# Altium PCB ROS_CAR.PcbDoc (part 4 of 13)
Units mil, origin at the board's own origin, x right, y up, seen from the top; angles counter-clockwise.
Board outline 3937.01 x 3937.01 mil, 2 copper layers (Top Layer, Bottom Layer); 201 components, 155 nets, 998 pads, 0 vias.
Unrouted connection lines stored in the file: 3.
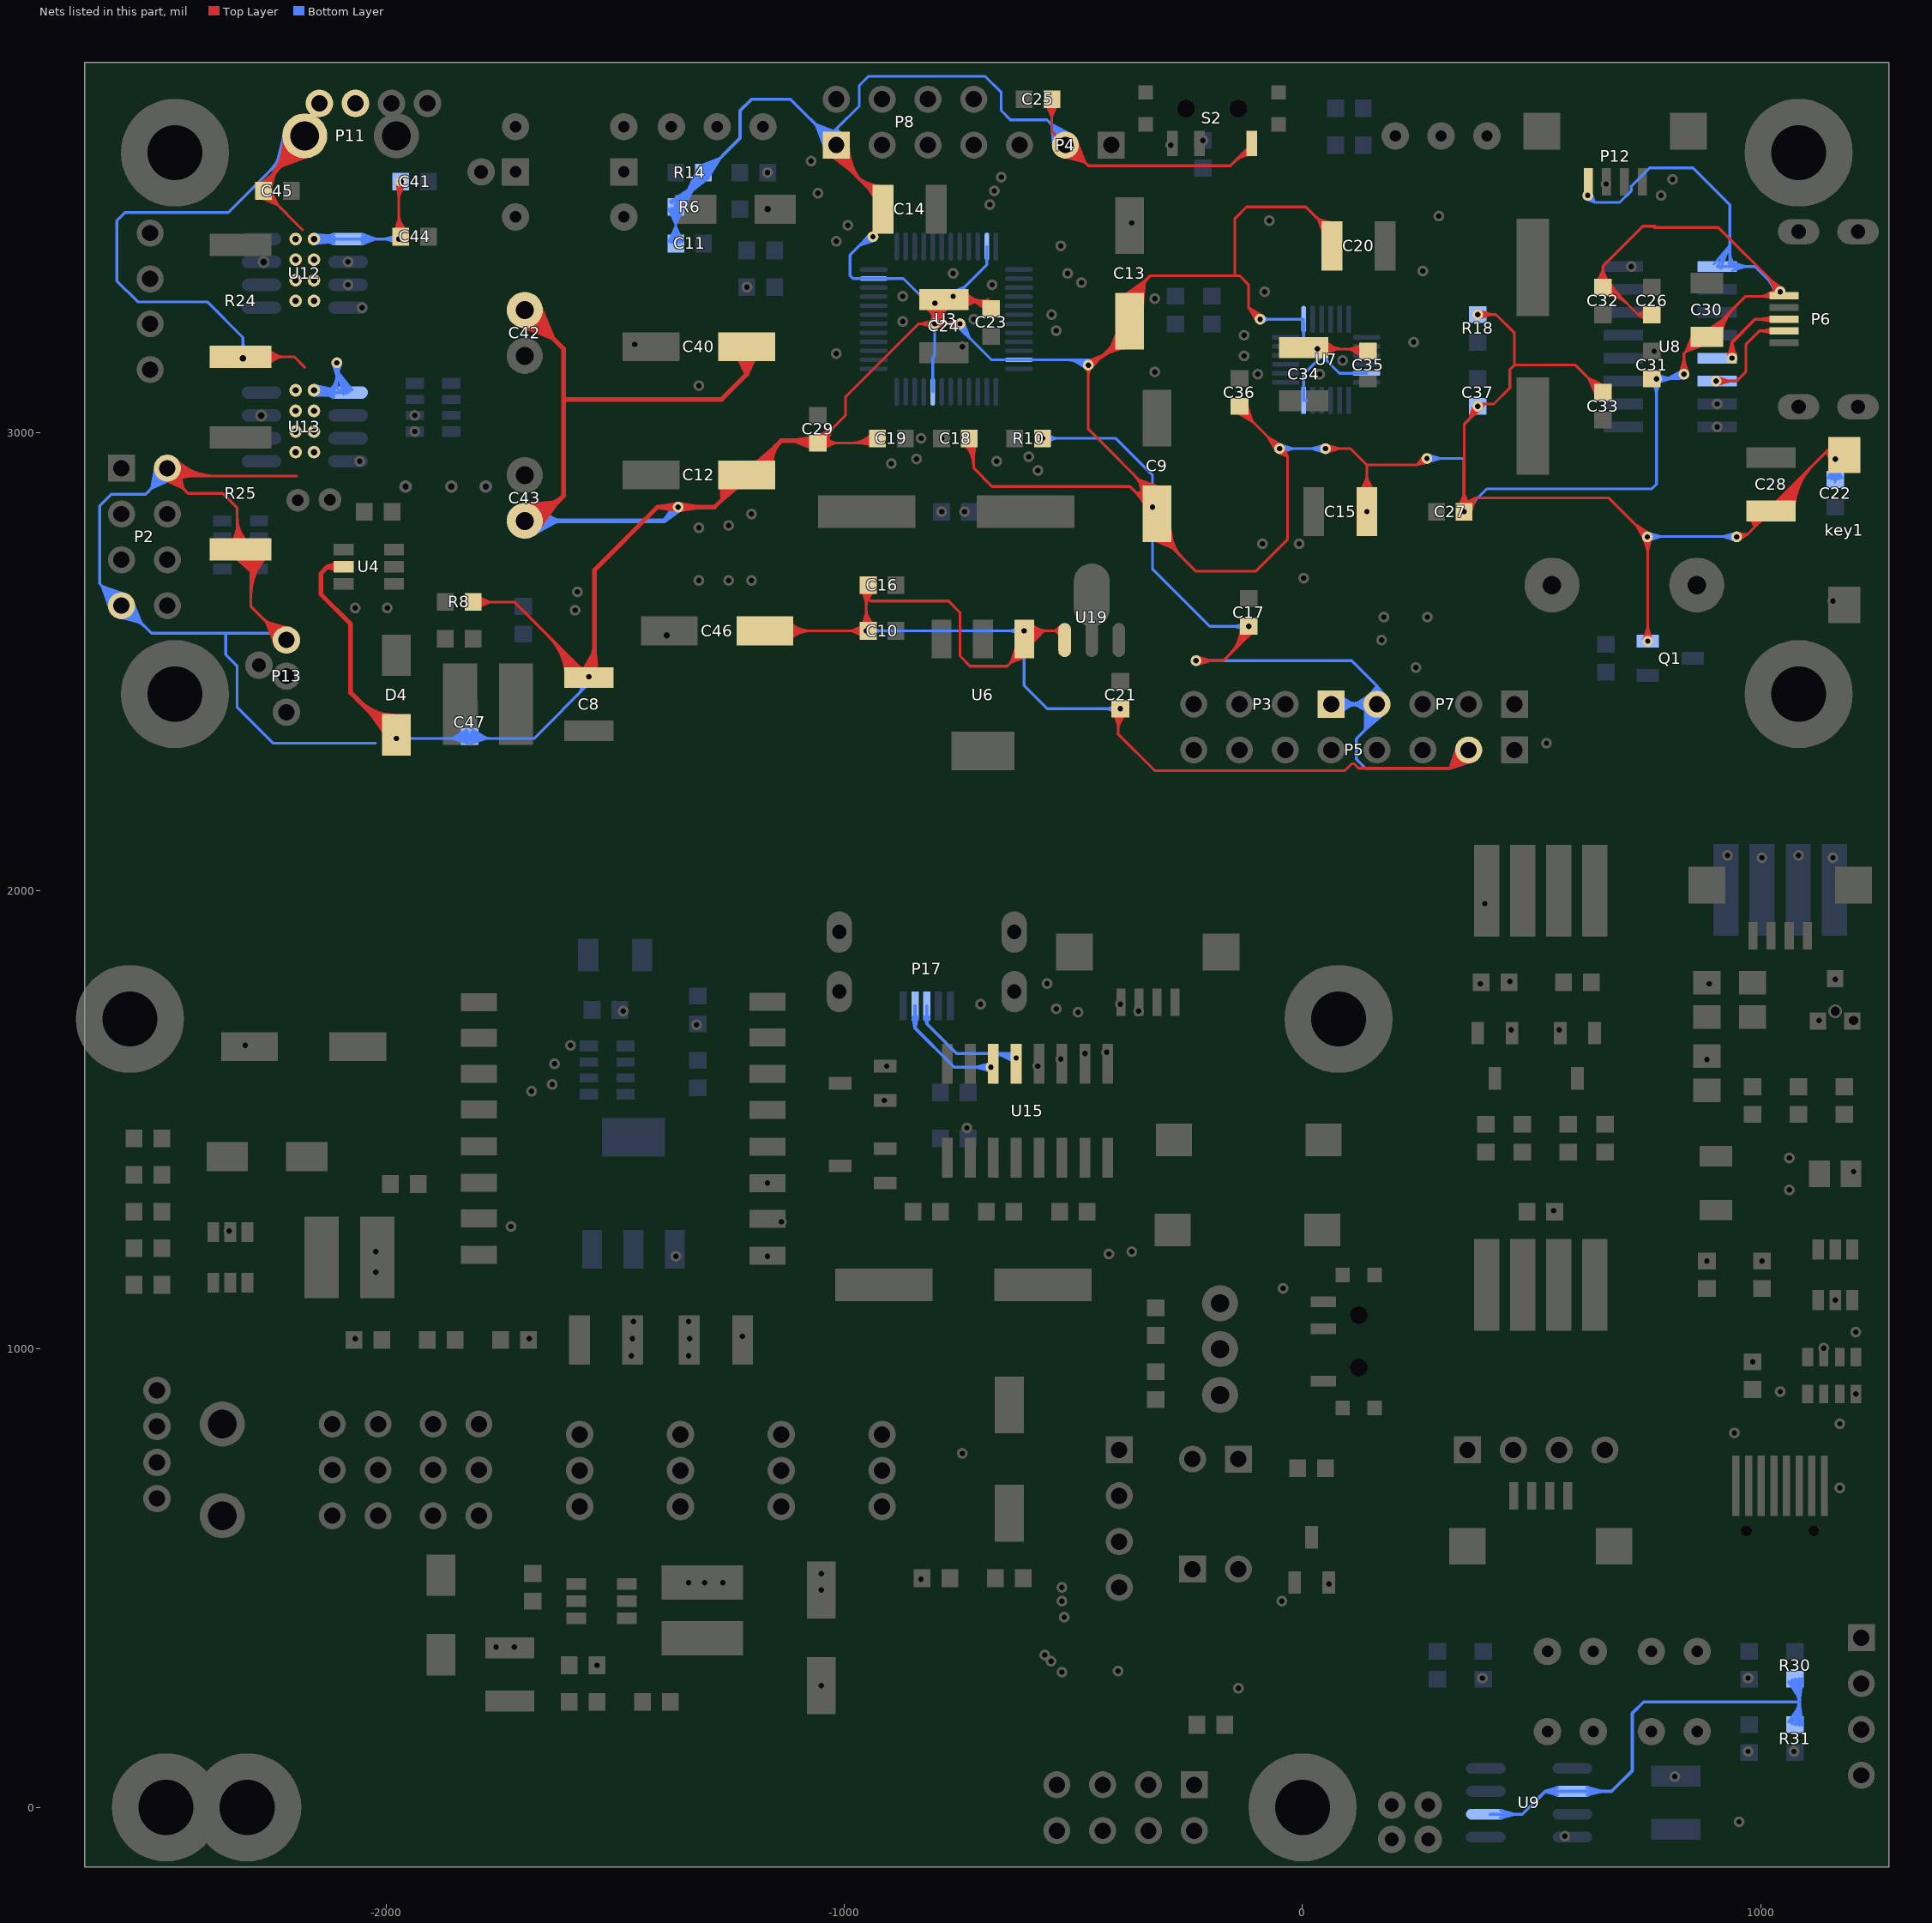
[diagram p4: the nets of this part, all layers, seen from the top]

## Nets (pads, with @x,y where several pads share a name; then routed paths per layer and width w, separated by ;. In a path a pad name is that pad's centre, name@x,y a point inside that pad or via, vN(x,y) a via of type N, cw(c..) or ccw(c..) an arc to the next point about the centre after c; other vN are vias at no path point) (continued)
CGND: (continued)
  Top Layer w6: -2247.48,3506.77 -2254.62,3533.89 -2247.48,3506.77 ; -2247.48,3506.77 -2247.17,3506.77 ; -2247.17,3506.77 -2272.95,3518.36 -2247.17,3506.77 ; -2247.17,3506.77 -2260.4,3531.75 -2247.17,3506.77 ; -2247.17,3506.77 -2274.85,3512.52 -2247.17,3506.77 ; -2247.17,3506.77 -2254.7,3534.02 -2247.17,3506.77 ; -1974.6,3457.6 pad.1@-1972.48,3422.09 ; -1973.92,3453.31 pad.1@-1972.48,3422.09 ; pad.1@-1972.48,3422.09 -1970.46,3455.52 ; pad.1@-1972.48,3422.09 -1971.03,3453.34 ; pad.1@-1972.48,3422.09 -1972,3452.04 ; -1591.96,2501.57 C8.2@-1569.75,2472.47 ; -1583.82,2490.9 pad.1@-1557.48,2467.09 ; C8.2@-1569.75,2472.47 pad.1@-1557.48,2467.09 ; -1026.45,3007.81 -1056.5,2976.77 -1020.19,2976.77 ; -984.1,2567.09 pad.1@-952.48,2567.09 ; -984.1,2567.09 C10.1@-953.71,2575.81 ; -984.1,2567.09 C10.1@-953.71,2558.36 ; -984.1,2567.09 pad.1@-952.48,2567.09 ; -984.1,2567.09 C10.1@-953.71,2575.81 ; -984.1,2567.09 C10.1@-953.71,2558.36 ; -984.1,2567.09 C10.1@-951.02,2582.05 ; -984.1,2567.09 C10.1@-951.02,2552.12 ; -983.68,2566.98 pad.1@-952.48,2567.09 ; -983.68,2567.2 pad.1@-952.48,2567.09 ; -983.68,2567.2 C10.1@-953.76,2558.37 ; -982.48,2566.94 pad.1@-952.48,2567.09 ; -982.48,2566.94 C10.1@-953.73,2558.36 ; -982.48,2567.24 pad.1@-952.48,2567.09 ; -982.48,2567.24 C10.1@-953.73,2575.81 ; -982.29,2567.09 pad.1@-952.48,2567.09 ; -982.29,2567.09 -953.78,2575.8 -982.29,2567.09 ; -982.29,2567.09 C10.1@-953.78,2558.37 ; -982.29,2567.09 pad.1@-952.48,2567.09 ; -982.29,2567.09 C10.1@-953.78,2558.37 ; -953.79,2600.23 pad.1@-952.48,2567.09 ; -953.37,2597.61 pad.1@-952.48,2567.09 ; -953.37,2597.61 -961.23,2568.1 -952.48,2604.62 ; pad.1@-952.48,2567.09 -952.48,2604.62 ; pad.1@-952.48,2567.09 C10.1@-938.79,2570.41 ; pad.1@-952.48,2567.09 -951.22,2598.88 ; pad.1@-952.48,2567.09 -951.58,2597.63 ; pad.1@-952.48,2567.09 -952.19,2596.96 ; pad.1@-952.48,2567.09 -952.48,2596.9 ; pad.1@-952.48,2567.09 C10.1@-951.02,2582.05 ; pad.1@-952.48,2567.09 C10.1@-951.02,2552.12 ; -952.48,2604.62 C10.1@-938.79,2570.41 ; -952.48,2629.29 -947.8,2666.1 -947.8,2637.4 ; C24.2@-811.23,3281.03 pad.1@-802.48,3245.44 ; C24.2@-811.23,3281.03 pad.1@-802.48,3245.44 ; C24.2@-811.23,3281.03 pad.1@-802.48,3245.44 ; pad.1@-802.48,3237.09 -796.72,3267.06 ; pad.1@-802.48,3237.09 -792.83,3267.02 ; pad.1@-802.48,3237.09 -788.6,3266.6 ; pad.1@-802.48,3237.09 -785.07,3265.94 ; pad.1@-802.48,3237.09 -781.23,3264.94 ; pad.1@-802.48,3237.09 -802.2,3266.9 ; pad.1@-802.48,3237.09 -799.51,3266.96 ; pad.1@-802.48,3237.09 pad.1@-802.48,3282.09 ; pad.1@-802.48,3245.44 pad.1@-802.48,3282.09 ; pad.1@-802.48,3245.44 C24.2@-793.73,3281.03 ; pad.1@-802.48,3245.44 pad.1@-802.48,3282.09 ; pad.1@-802.48,3245.44 C24.2@-793.73,3281.03 ; pad.1@-802.48,3245.44 pad.1@-802.48,3282.09 ; pad.1@-802.48,3245.44 C24.2@-793.73,3281.03 ; pad.1@-802.48,3245.44 C24.2@-789.87,3292.77 ; pad.1@-802.48,3245.44 C24.2@-795.78,3293.97 ; pad.1@-802.48,3245.44 C24.2@-801.85,3294.42 ; pad.1@-802.48,3282.09 C24.2@-789.87,3292.77 ; pad.1@-802.48,3282.09 C24.2@-795.78,3293.97 ; pad.1@-802.48,3282.09 C24.2@-801.85,3294.42 ; pad.1@-802.48,3282.09 C24.2@-772.48,3282.09 ; C24.2@-772.48,3282.09 pad.1@-762.48,3297.09 ; pad.1@-762.48,3297.09 C24.2@-750.44,3297.88 ; pad.1@-762.48,3297.09 C24.2@-732.17,3292.89 ; pad.1@-762.48,3297.09 C24.2@-729.07,3288.45 ; C24.2@-750.44,3297.88 -710.89,3287.09 ; pad.1@-607.48,2567.09 -577.67,2567.19 ; pad.1@-607.48,2567.09 -576.84,2565.51 ; pad.1@-607.48,2567.09 -574.46,2564.41 ; pad.1@-607.48,2567.09 -539.06,2567.09 ; P4.2@-517.48,3627.09 -474.18,3588.79 ; pad.1@-467.48,3147.09 -437.22,3167.35 ; pad.1@-467.48,3147.09 -467.48,3007.48 -327.48,2867.48 pad.1@-327.48,2837.09 ; -403.13,2364.66 pad.1@-397.48,2397.09 ; -403.13,2364.66 C21.2@-389.08,2394.43 ; -402.48,2360.17 pad.1@-397.48,2397.09 ; -402.48,2360.17 -406.29,2397.23 -402.35,2366.98 ; -402.48,2360.17 C21.2@-383.93,2391.98 ; -402.48,2366.64 pad.1@-397.48,2397.09 ; -402.48,2366.64 C21.2@-389.08,2394.43 ; -402.35,2366.98 pad.1@-397.48,2397.09 ; -402.35,2366.98 C21.2@-389.08,2394.44 ; -401.68,2367.44 pad.1@-397.48,2397.09 ; -401.06,2367.2 pad.1@-397.48,2397.09 ; -400.57,2365.21 pad.1@-397.48,2397.09 ; pad.1@-397.48,2397.09 C21.2@-383.93,2391.98 ; -361.7,2866.98 C9.2@-319.02,2849.04 ; -355.97,2864.57 pad.1@-327.48,2837.09 ; -355.67,2858.95 pad.1@-327.48,2837.09 ; -353.79,2859.06 pad.1@-327.48,2837.09 ; -353.6,2858.77 pad.1@-327.48,2837.09 ; -352.79,2861.78 pad.1@-327.48,2837.09 ; -352.52,2859.87 pad.1@-327.48,2837.09 ; C9.2@-345.48,2866.28 pad.1@-327.48,2837.09 ; C9.2@-341.19,2865.03 pad.1@-327.48,2837.09 ; C9.2@-339.26,2868.76 pad.1@-327.48,2837.09 ; pad.1@-327.48,2837.09 C9.2@-319.02,2849.04 ; -135.24,2547.48 C17.2@-117.48,2576.77 ; -133.02,2549.01 C17.2@-117.48,2576.77 ; -131.92,2549.02 C17.2@-117.48,2576.77 ; C17.2@-131.58,2570.82 C17.2@-117.48,2576.77 ; C17.2@-131.58,2570.82 -123.1,2583.56 C17.2@-131.58,2570.82 ; C17.2@-131.58,2570.82 -116.54,2568.01 C17.2@-131.58,2570.82 ; C17.2@-131.58,2570.82 C17.2@-117.48,2576.77 ; C17.2@-131.58,2570.82 -117.48,2557.09 ; C17.2@-131.58,2570.82 -117.48,2557.09 ; -131.55,2542.87 C17.2@-117.48,2576.77 ; -131.55,2542.87 -125.96,2579.15 -130.6,2546.07 ; -131.09,2548.42 C17.2@-117.48,2576.77 ; -130.6,2546.07 C17.2@-117.48,2576.77 ; C17.2@-126.07,2574.8 -117.48,2557.09 ; C17.2@-126.07,2574.8 -117.48,2557.09 ; C17.2@-126.07,2574.8 -117.48,2557.09 ; C17.2@-126.07,2574.8 -117.48,2557.09 ; C17.2@-126.07,2574.8 -117.48,2557.09 ; C17.2@-126.07,2574.8 -117.48,2557.09 ; C17.2@-126.07,2574.8 -117.48,2557.09 ; C17.2@-126.07,2574.8 -117.48,2557.09 ; C17.2@-126.07,2574.8 -117.48,2557.09 ; C17.2@-126.07,2574.8 -117.48,2557.09 ; C17.2@-126.07,2574.8 -117.48,2557.09 ; C17.2@-126.07,2574.8 -117.48,2557.09 ; C17.2@-126.07,2574.8 -117.48,2557.09 ; C17.2@-126.07,2574.8 -117.48,2557.09 ; -117.48,2557.09 C17.2@-117.48,2576.77 ; -117.48,2557.09 C17.2@-108.89,2574.8 ; -117.48,2557.09 C17.2@-108.89,2574.8 ; -117.48,2557.09 C17.2@-117.48,2576.77 ; -117.48,2557.09 C17.2@-108.89,2574.8 ; -117.48,2557.09 C17.2@-117.48,2576.77 ; -117.48,2557.09 C17.2@-108.89,2574.8 ; -117.48,2557.09 C17.2@-117.48,2576.77 ; -117.48,2557.09 C17.2@-108.89,2574.8 ; -117.48,2557.09 C17.2@-117.48,2576.77 ; -117.48,2557.09 C17.2@-108.89,2574.8 ; -117.48,2557.09 C17.2@-117.48,2576.77 ; -117.48,2557.09 C17.2@-108.89,2574.8 ; -117.48,2557.09 C17.2@-117.48,2576.77 ; -117.48,2557.09 C17.2@-108.89,2574.8 ; -117.48,2557.09 C17.2@-117.48,2576.77 ; -117.48,2557.09 C17.2@-108.89,2574.8 ; -117.48,2557.09 C17.2@-117.48,2576.77 ; -117.48,2557.09 C17.2@-108.89,2574.8 ; -117.48,2557.09 C17.2@-108.89,2574.8 ; -117.48,2557.09 C17.2@-117.48,2576.77 ; -117.48,2557.09 C17.2@-108.89,2574.8 ; -117.48,2557.09 C17.2@-117.48,2576.77 ; -117.48,2557.09 C17.2@-108.89,2574.8 ; -117.48,2557.09 C17.2@-117.48,2576.77 ; -117.48,2557.09 C17.2@-108.89,2574.8 ; -117.48,2557.09 -120.78,2576.49 -117.48,2557.09 ; -117.48,2557.09 -114.18,2576.49 -117.48,2557.09 ; -117.48,2557.09 -126.52,2574.57 -117.48,2557.09 ; -117.48,2557.09 -108.44,2574.57 -117.48,2557.09 ; -117.48,2557.09 C17.2@-103.38,2570.82 ; -117.48,2557.09 C17.2@-117.48,2576.77 ; -117.48,2557.09 C17.2@-103.38,2570.82 ; -117.48,2557.09 C17.2@-117.48,2576.77 ; C17.2@-117.48,2576.77 C17.2@-103.38,2570.82 ; C17.2@-117.48,2576.77 C17.2@-103.38,2570.82 ; C17.2@-103.38,2570.82 -118.42,2568.01 C17.2@-103.38,2570.82 ; C17.2@-103.38,2570.82 -111.86,2583.56 C17.2@-103.38,2570.82 ; pad.1@32.52,3182.09 66.16,3184.33 ; pad.1@32.52,3182.09 65.72,3179.89 ; pad.1@32.52,3182.09 62.74,3183.04 ; pad.1@32.52,3182.09 63.01,3180.88 ; 140.59,2929.02 249.45,2929.02 ; 351.53,2859.43 pad.1@352.52,2827.09 ; 352.18,2857.21 pad.1@352.52,2827.09 ; pad.1@352.52,2827.09 354.06,2859.72 ; pad.1@352.52,2827.09 353.48,2857.34 ; pad.1@352.52,2827.09 352.83,2856.9 ; pad.1@352.52,2827.09 352.83,2856.9 ; pad.1@352.52,2827.09 375.72,2853.46 ; pad.1@352.52,2827.09 374.34,2852.61 ; pad.1@352.52,2827.09 374.45,2854.89 ; pad.1@352.52,2827.09 373.69,2853.3 ; pad.1@352.52,2827.09 373.64,2853.2 ; pad.1@352.52,2827.09 373.84,2852.77 ; 352.83,2856.9 361.25,2828.3 352.83,2856.9 ; 352.83,2856.9 343.82,2828.48 352.83,2856.9 ; 352.83,2864.38 352.83,2828.07 377.52,2857.09 ; 363.89,3028.45 pad.1@382.52,3057.09 ; 373.64,2853.2 360.04,2822.49 373.69,2853.3 ; 373.64,2853.2 346.45,2833.48 373.69,2853.3 ; pad.1@382.52,3057.09 397.52,3062.09 ; 397.52,3062.09 417.52,3062.09 452.52,3097.09 452.52,3137.09 462.52,3147.09 ; 728.86,2797.32 pad.1@752.52,2772.09 753.31,2742.25 ; 1005.9,3297.09 pad.1@1042.52,3307.09 ; 1020.41,3334.2 pad.1@1042.52,3307.09 ; 1142.52,2957.09 pad.1@1162.52,2942.09 ; 1142.52,2957.09 key1.2@1166.48,2949.96 ; 1142.52,2957.09 key1.2@1156.07,2936.08 ; 1142.52,2957.09 pad.1@1162.52,2942.09 ; 1142.52,2957.09 key1.2@1166.48,2949.96 ; 1142.52,2957.09 key1.2@1156.07,2936.08 ; 1142.52,2957.09 pad.1@1162.52,2942.09 ; 1142.52,2957.09 key1.2@1166.48,2949.96 ; 1142.52,2957.09 key1.2@1156.07,2936.08 ; 1142.52,2957.09 pad.1@1162.52,2942.09 ; 1142.52,2957.09 key1.2@1166.48,2949.96 ; 1142.52,2957.09 key1.2@1156.07,2936.08 ; 1142.52,2957.09 pad.1@1162.52,2942.09 ; 1142.52,2957.09 key1.2@1166.48,2949.96 ; 1142.52,2957.09 key1.2@1156.07,2936.08 ; 1142.52,2957.09 key1.2@1181.07,2946.1 ; 1142.52,2957.09 key1.2@1178.98,2940.42 ; 1142.52,2957.09 key1.2@1176,2935.04 ; 1142.52,2957.09 key1.2@1172.16,2930.09 ; 1142.52,2957.09 key1.2@1167.45,2925.69 ; pad.1@1162.52,2942.09 key1.2@1181.07,2946.1 ; pad.1@1162.52,2942.09 key1.2@1178.98,2940.42 ; pad.1@1162.52,2942.09 key1.2@1176,2935.04 ; pad.1@1162.52,2942.09 key1.2@1167.45,2925.69 ; pad.1@1162.52,2942.09 key1.2@1172.16,2930.09
  Top Layer w10: U4.2@-2106.97,2701.57 ccw(c-2120.28,2688.27) -2120.28,2707.09 ccw(c-2120.28,2725.91) U4.2@-2106.97,2712.6 ; U4.2@-2102.62,2699.38 -2127.48,2707.09 ; U4.2@-2102.62,2714.79 -2127.48,2707.09 ; U4.2@-2101.46,2707.09 -2127.48,2707.09 ; U4.2@-2092.6,2707.09 -2127.48,2707.09 ; -2060.55,2415.16 ccw(c-1977.48,2498.23) D4.1@-1977.48,2380.75 ; -2043.48,2398.09 ccw(c-1977.48,2464.08) D4.1@-1977.48,2370.75 ; -2026.41,2381.01 ccw(c-1977.48,2429.94) D4.1@-1977.48,2360.75 ; -2009.34,2363.94 ccw(c-1977.48,2395.8) D4.1@-1977.48,2350.75 ; D4.1@-1995.49,2334.81 -2033.18,2387.79 ; D4.1@-1987.71,2341.31 -2033.18,2387.79 ; D4.1@-1984.29,2332.09 ccw(c-2000.73,2332.09) -1989.11,2343.71 ccw(c-1977.48,2355.34) D4.1@-1977.48,2338.9 ; D4.1@-1982.63,2327.63 -2010.5,2365.11 D4.1@-1973.03,2337.24 ; D4.1@-1982.6,2327.6 -2010.81,2364.92 ; D4.1@-1981.1,2348.86 -2033.18,2387.79 ; D4.1@-1977.48,2354.25 -2033.18,2387.79 ; D4.1@-1974.41,2359.98 -2033.18,2387.79 ; D4.1@-1973.07,2337.27 -2010.81,2364.92 ; D4.1@-1970.83,2369.35 -2033.18,2387.79 ; D4.1@-1968.73,2379.26 -2033.18,2387.79 ; C42.2@-1716.41,3238.4 -1636.9,3206.5 ; C42.2@-1712.09,3247.58 -1636.9,3206.5 ; C43.2@-1707.89,2839.84 -1627.07,2847.49 ; C42.2@-1706.75,3256.11 -1636.9,3206.5 ; C43.2@-1706.3,2829.8 -1627.07,2847.49 ; C43.2@-1703.5,2820.13 -1627.07,2847.49 ; C42.2@-1697.48,3232.72 cw(c-1697.48,3149.74) -1638.81,3208.41 cw(c-1580.13,3267.09) C42.2@-1663.11,3267.09 ; C42.2@-1697.48,3242.72 cw(c-1697.48,3183.88) -1655.88,3225.48 cw(c-1614.28,3267.09) C42.2@-1673.11,3267.09 ; C42.2@-1697.48,3267.09 -1612.48,3182.09 -1612.48,2862.09 ; C43.2@-1696.45,2811.33 ccw(c-1684.91,2858.95) -1650.26,2824.3 ; C43.2@-1694.09,2821.05 ccw(c-1679.99,2879.22) -1637.67,2836.9 ; C43.2@-1691.74,2830.77 ccw(c-1675.08,2899.49) -1625.08,2849.49 ; C43.2@-1689.38,2840.49 ccw(c-1670.16,2919.76) -1612.48,2862.08 ; C43.2@-1689.25,2795.31 -1627.07,2847.49 ; C42.2@-1686.5,3276.36 -1636.9,3206.5 ; C43.2@-1682.31,2788.01 -1627.07,2847.49 ; C42.2@-1677.97,3281.69 -1636.9,3206.5 ; C43.2@-1674.45,2781.57 -1627.07,2847.49 ; C42.2@-1668.8,3286.02 -1636.9,3206.5 ; -1612.48,3072.09 -1267.48,3072.09 -1213.15,3126.42 ; C8.2@-1570.09,2477.77 ccw(c-1630.67,2538.34) -1545,2538.34 ; C8.2@-1564.99,2467.4 -1545,2520.6 ; C8.2@-1564.04,2468.92 -1549.02,2509.91 ; C8.2@-1564.01,2469.04 -1545.07,2520.48 ; C8.2@-1563.96,2469.18 -1547.82,2508.1 ; C8.2@-1563.92,2469.3 -1545,2513.82 ; C8.2@-1563.89,2469.38 -1545.92,2509.55 ; C8.2@-1563.02,2470.7 ccw(c-1606.53,2514.2) -1545,2514.2 ; C8.2@-1562.3,2471.9 ccw(c-1604.05,2513.66) -1545,2513.66 ; C8.2@-1560.59,2461.03 C8.2@-1574.05,2471.76 ; C8.2@-1557.48,2465.16 -1545,2520.6 ; C8.2@-1556.97,2473.88 C8.2@-1574.05,2471.76 ; C8.2@-1556.75,2460.31 C8.2@-1545,2465 ; C8.2@-1555.95,2463.63 ccw(c-1582.38,2490.06) -1545,2490.06 ; C8.2@-1555.23,2464.83 ccw(c-1579.91,2489.52) -1545,2489.52 ; C8.2@-1554.59,2473.25 C8.2@-1545,2465 ; C8.2@-1550.79,2465.8 -1545,2513.82 ; C8.2@-1550.79,2465.81 -1545.92,2509.55 ; C8.2@-1550.76,2465.96 -1545.07,2520.48 ; C8.2@-1550.75,2466.07 -1547.82,2508.1 ; C8.2@-1550.72,2466.29 -1549.02,2509.91 ; C8.2@-1549.74,2463.97 -1545,2520.6 ; C8.2@-1548.15,2457.76 ccw(c-1555.77,2465.38) C8.2@-1545,2465.38 ; C8.2@-1539.68,2464.02 -1545,2520.6 ; pad.1@-1367.3,2832.27 ccw(c-1378.92,2820.64) -1378.92,2837.09 ccw(c-1378.92,2853.53) pad.1@-1367.3,2841.9 ; pad.1@-1363.04,2830.3 -1404.29,2837.09 pad.1@-1363.04,2843.88 ; pad.1@-1361.93,2830.3 -1320.67,2837.09 pad.1@-1361.93,2843.88 ; pad.1@-1357.66,2832.27 cw(c-1346.04,2820.64) -1346.04,2837.09 cw(c-1346.04,2853.53) pad.1@-1357.66,2841.9 ; C12.2@-1269.8,2911.43 -1265.86,2854.38 ; -1267.89,2852.34 ccw(c-1289.09,2873.54) C12.2@-1264.98,2891.35 ; -1259.68,2860.56 ccw(c-1279.64,2880.52) C12.2@-1256.93,2897.29 ; C12.2@-1259.63,2911.23 -1265.86,2854.38 ; -1251.46,2868.77 ccw(c-1270.19,2887.5) C12.2@-1248.89,2903.23 ; C12.2@-1249.78,2909.26 -1265.86,2854.38 ; C12.2@-1243.66,2907.09 -1265.86,2854.38 ; C40.2@-1239.01,3181.3 -1213.15,3126.42 ; C12.2@-1237.83,2904.23 -1265.86,2854.38 ; C40.2@-1231.16,3167.65 cw(c-1269.35,3126.42) -1213.15,3126.42 ; C12.2@-1229.54,2898.56 -1265.86,2854.38 ; C40.2@-1229.49,3184.84 -1213.15,3126.42 ; C40.2@-1224.36,3174.99 cw(c-1248.14,3149.32) -1213.15,3149.32 cw(c-1178.16,3149.32) C40.2@-1201.94,3174.99 ; C12.2@-1222.29,2891.43 -1265.86,2854.38 ; C40.2@-1219.64,3186.74 -1213.15,3126.42 ; C12.2@-1212.05,2908.19 C12.2@-1188.58,2908.19 ; C40.2@-1206.66,3186.74 -1213.15,3126.42 ; C12.2@-1204.01,2922.75 -1160.44,2959.8 ; C40.2@-1196.81,3184.84 -1213.15,3126.42 ; C12.2@-1196.76,2915.61 -1160.44,2959.8 ; C40.2@-1195.14,3167.65 ccw(c-1156.95,3126.42) -1213.15,3126.42 ; C12.2@-1188.47,2909.94 -1160.44,2959.8 ; C40.2@-1187.29,3181.3 -1213.15,3126.42 ; C12.2@-1186.03,2906.22 cw(c-1146.83,2916.2) -1175.44,2944.8 ; C12.2@-1182.64,2907.09 -1160.44,2959.8 ; C12.2@-1176.52,2904.91 -1160.44,2959.8 ; C12.2@-1176.34,2908.69 cw(c-1127.02,2921.24) -1163.01,2957.23 ; C12.2@-1166.67,2902.94 -1160.44,2959.8 ; C12.2@-1166.65,2911.15 cw(c-1107.2,2926.28) -1150.58,2969.66 ; C12.2@-1156.96,2913.62 cw(c-1087.39,2931.32) -1138.15,2982.08 ; C12.2@-1156.5,2902.74 -1160.44,2959.8 ; -1103.42,2982.09 cw(c-1103.42,2931.81) C29.2@-1067.87,2967.36 ; -1079.28,2982.09 cw(c-1079.28,2955.96) C29.2@-1060.8,2974.43 ; -1077.76,2982.09 ccw(c-1077.76,2996.07) C29.2@-1067.87,2986.18 ; C29.2@-1061.7,2963.86 -1107.11,2982.09 ; C29.2@-1058.83,2990.07 -1107.11,2982.09 ; C29.2@-1058.46,2976.77 -1107.11,2982.09 ; C29.2@-1052.48,2982.09 -1138.15,2982.09 ; -2127.48,2707.09 -2142.48,2692.09 -2142.48,2647.09 -2077.48,2582.09 -2077.48,2432.09 pad.1@-1977.48,2332.09 -2010.81,2364.92 ; -1627.07,2847.49 C43.2@-1697.48,2807.09 -1667.48,2807.09 -1612.48,2862.09 ; C8.2@-1574.05,2471.76 pad.1@-1557.48,2467.09 ; C8.2@-1574.05,2471.76 -1545,2520.6 ; pad.1@-1557.48,2467.09 -1545.07,2520.48 ; pad.1@-1557.48,2467.09 -1549.02,2509.91 ; pad.1@-1557.48,2467.09 C8.2@-1545,2465 ; pad.1@-1557.48,2467.09 -1545,2513.82 ; pad.1@-1557.48,2467.09 -1547.82,2508.1 ; pad.1@-1557.48,2467.09 -1545.92,2509.55 ; C8.2@-1545,2465 -1545,2700 -1407.91,2837.09 -1283.15,2837.09 -1138.15,2982.09 ; -1213.15,3126.42 C40.2@-1213.15,3187.09 -1213.15,3126.42
  Bottom Layer w6: -2623.04,2668.04 cw(c-2669,2622.09) P2.7@-2604.01,2622.09 ; -2622.09,2667.09 ccw(c-2577.48,2711.71) P2.7@-2577.48,2648.61 ; -2612.8,2657.8 cw(c-2648.52,2622.09) P2.7@-2598.01,2622.09 ; -2611.85,2656.85 ccw(c-2577.48,2691.22) P2.7@-2577.48,2642.61 ; -2602.56,2647.56 cw(c-2628.03,2622.09) P2.7@-2592.01,2622.09 ; -2601.61,2646.61 ccw(c-2577.48,2670.74) P2.7@-2577.48,2636.61 ; P2.7@-2600.01,2608.08 -2619.42,2664.42 ; P2.7@-2594.33,2610.37 -2619.42,2664.42 ; P2.7@-2589.97,2598.68 -2533.68,2583.68 ; P2.7@-2588.97,2613.2 -2619.42,2664.42 ; P2.7@-2588.08,2604.51 -2533.68,2583.68 ; P2.7@-2585.62,2610.05 -2533.68,2583.68 ; P2.7@-2583.95,2616.53 -2619.42,2664.42 ; P2.7@-2582.62,2615.28 -2533.68,2583.68 ; P2.7@-2577.48,2595.56 cw(c-2577.48,2518.5) -2522.99,2572.99 ; P2.7@-2577.48,2601.56 cw(c-2577.48,2538.98) -2533.23,2583.23 ; P2.7@-2577.48,2607.56 cw(c-2577.48,2559.47) -2543.47,2593.47 ; P2.7@-2577.48,2613.56 cw(c-2577.48,2579.95) -2553.72,2603.72 ; P2.7@-2571.87,2628.51 -2619.42,2664.42 ; P2.7@-2571.4,2628.07 -2533.68,2583.68 ; P2.7@-2568.48,2633.49 -2619.42,2664.42 ; P2.7@-2566.62,2631.73 -2533.68,2583.68 ; P2.7@-2565.6,2638.83 -2619.42,2664.42 ; P2.7@-2563.26,2644.48 -2619.42,2664.42 ; P2.7@-2561.44,2634.9 -2533.68,2583.68 ; P2.7@-2556.95,2622.09 ccw(c-2520.42,2622.09) -2546.25,2596.25 ; P2.7@-2555.91,2637.53 -2533.68,2583.68 ; P2.7@-2550.95,2622.09 ccw(c-2499.93,2622.09) -2536.01,2586.01 ; -2519.56,2870 ccw(c-2559.34,2909.78) P2.2@-2503.71,2918.14 ; -2511.16,2878.41 ccw(c-2544.72,2911.98) P2.2@-2497.78,2919.04 ; -2505.69,2883.87 cw(c-2477.48,2855.66) P2.2@-2477.48,2895.56 ; -2502.75,2886.82 ccw(c-2530.11,2914.18) P2.2@-2491.85,2919.93 ; P2.2@-2501.65,2933.01 -2512.28,2877.29 ; P2.2@-2495.7,2931.54 -2512.28,2877.29 ; -2495.45,2894.12 cw(c-2477.48,2876.14) P2.2@-2477.48,2901.56 ; -2494.34,2895.23 ccw(c-2515.49,2916.37) P2.2@-2485.91,2920.82 ; P2.2@-2490,2929.46 -2512.28,2877.29 ; P2.2@-2484.59,2926.8 -2512.28,2877.29 ; P2.2@-2477.48,2912.09 -2524.57,2865 -2600,2865 -2625,2840 -2625,2670 -2577.48,2622.48 -2577.48,2612.09 -2562.09,2612.09 -2512.09,2562.09 -2247.09,2562.09 P13.1@-2220,2535 ; P2.2@-2477.48,2922.09 -2512.28,2877.29 ; P2.2@-2471.16,2916.36 -2512.28,2877.29 ; P2.2@-2467.24,2911.78 -2512.28,2877.29 ; P2.2@-2463.82,2906.77 -2512.28,2877.29 ; P2.2@-2460.92,2901.37 -2512.28,2877.29 ; -2350,2562.09 -2350,2515 -2325,2490 -2325,2400 -2247.09,2322.09 -2022.89,2322.09 ; pad.11@-2323.1,3163.91 -2312.48,3193.87 ; pad.11@-2320.1,3169.71 ccw(c-2338.5,3188.11) -2312.48,3188.11 ccw(c-2286.46,3188.11) pad.11@-2304.86,3169.71 ; pad.11@-2317.25,3162.45 -2312.48,3193.87 ; pad.11@-2312.48,3162.09 -2312.48,3207.09 -2390.39,3285 -2542.02,3285 -2587.48,3330.46 -2587.48,3462.52 -2569.92,3480.08 -2344.49,3480.08 P11.2@-2172.48,3652.09 ; pad.11@-2307.71,3162.45 -2312.48,3193.87 ; pad.11@-2301.86,3163.91 -2312.48,3193.87 ; P13.1@-2232.48,2562.09 P13.1@-2207.48,2537.09 ; P11.2@-2223.69,3647.09 cw(c-2335.26,3647.09) -2256.37,3568.2 cw(c-2177.48,3489.31) P11.2@-2177.48,3600.87 ; P11.2@-2217.69,3647.09 cw(c-2314.77,3647.09) -2246.13,3578.44 cw(c-2177.48,3509.79) P11.2@-2177.48,3606.87 ; P11.2@-2217.62,3669.99 -2239.42,3585.15 ; P11.2@-2211.69,3647.09 cw(c-2294.29,3647.09) -2235.88,3588.68 cw(c-2177.48,3530.28) P11.2@-2177.48,3612.87 ; P11.2@-2211.68,3668.24 -2239.42,3585.15 ; P11.2@-2205.93,3666.09 -2239.42,3585.15 ; P11.2@-2205.69,3647.09 cw(c-2273.8,3647.09) -2225.64,3598.92 cw(c-2177.48,3550.76) P11.2@-2177.48,3618.87 ; P11.2@-2200.38,3663.56 -2239.42,3585.15 ; P11.2@-2199.69,3647.09 cw(c-2253.32,3647.09) -2215.4,3609.17 cw(c-2177.48,3571.25) P11.2@-2177.48,3624.87 ; P11.2@-2195.05,3660.68 -2239.42,3585.15 ; P11.2@-2163.89,3629.52 -2239.42,3585.15 ; P11.2@-2161,3624.19 -2239.42,3585.15 ; pad.11@-2159.46,3081.49 -2126.77,3080.87 ; pad.11@-2158.79,3087.49 -2126.77,3080.87 ; P11.2@-2158.48,3618.64 -2239.42,3585.15 ; pad.11@-2158.33,3081.34 U13.1@-2124.46,3084.08 ; pad.11@-2158.28,3087.37 U13.1@-2124.46,3084.08 ; pad.11@-2158.15,3417.35 U12.1@-2124.09,3414.92 ; pad.11@-2158.15,3426.82 U12.1@-2124.09,3429.26 ; pad.11@-2158.05,3411.32 U12.1@-2124.09,3414.92 ; pad.11@-2158.05,3432.85 U12.1@-2124.09,3429.26 ; pad.11@-2157.86,3087.32 U13.1@-2124.89,3087.09 ; pad.11@-2157.84,3087.32 U13.1@-2122.78,3087.09 ; pad.11@-2157.6,3096.86 U13.1@-2120.9,3095.38 ; pad.11@-2157.56,3417.31 U12.1@-2124.93,3419.15 ; pad.11@-2157.56,3426.87 U12.1@-2124.93,3425.02 ; pad.11@-2157.36,3081.31 U13.1@-2122.78,3087.09 ; pad.11@-2157.37,3087.31 U13.1@-2121.6,3090.53 ; pad.11@-2157.35,3081.31 U13.1@-2124.89,3087.09 ; pad.11@-2156.96,3096.84 U13.1@-2121.6,3090.53 ; pad.11@-2156.86,3102.85 U13.1@-2120.9,3095.38 ; pad.11@-2156.74,3087.36 U13.1@-2120.9,3095.38 ; pad.11@-2156.67,3411.34 U12.1@-2124.93,3419.15 ; pad.11@-2156.7,3417.37 U12.1@-2124.93,3425.02 ; pad.11@-2156.7,3426.8 U12.1@-2124.93,3419.15 ; pad.11@-2156.67,3432.84 U12.1@-2124.93,3425.02 ; pad.11@-2156.48,3096.76 U13.1@-2122.78,3087.09 ; pad.11@-2156.41,3096.75 U13.1@-2124.89,3087.09 ; pad.11@-2156.33,3081.37 U13.1@-2121.6,3090.53 ; P11.2@-2156.33,3612.88 -2239.42,3585.15 ; pad.11@-2156.15,3417.5 U12.1@-2124.09,3429.26 ; pad.11@-2156.15,3426.68 U12.1@-2124.09,3414.92 ; pad.11@-2156.03,3096.64 U13.1@-2124.46,3084.08 ; pad.11@-2155.52,3096.44 -2126.77,3080.87 ; pad.11@-2155.4,3102.66 U13.1@-2121.6,3090.53 ; pad.11@-2154.95,3081.61 U13.1@-2120.9,3095.38 ; pad.11@-2154.75,3411.66 U12.1@-2124.93,3425.02 ; pad.11@-2154.75,3432.52 U12.1@-2124.93,3419.15 ; P11.2@-2154.58,3606.95 -2239.42,3585.15 ; pad.11@-2154.32,3102.39 U13.1@-2122.78,3087.09 ; pad.11@-2154.13,3102.33 U13.1@-2124.89,3087.09 ; pad.11@-2154.1,3095.47 ccw(c-2133.87,3115.7) -2133.87,3087.09 ; pad.11@-2153.58,3412.04 U12.1@-2124.09,3429.26 ; pad.11@-2153.58,3432.14 U12.1@-2124.09,3414.92 ; pad.11@-2153.31,3102.03 U13.1@-2124.46,3084.08 ; pad.11@-2152.16,3101.46 -2126.77,3080.87 ; pad.11@-2149.86,3084.46 cw(c-2143.53,3078.13) -2143.53,3087.09 ; pad.11@-2149.86,3099.71 ccw(c-2119.39,3130.18) U13.1@-2119.39,3087.09 ; pad.11@-2149.86,3414.46 cw(c-2131.46,3396.06) -2131.46,3422.09 cw(c-2131.46,3448.11) pad.11@-2149.86,3429.71 ; U13.1@-2120.14,3079.46 ccw(c-2138.54,3061.06) -2138.54,3087.09 ccw(c-2138.54,3113.11) -2120.14,3094.71 ccw(c-2150.71,3125.28) -2107.48,3125.28 ; U12.1@-2120.14,3414.46 ccw(c-2138.54,3396.06) -2138.54,3422.09 ccw(c-2138.54,3448.11) U12.1@-2120.14,3429.71 ; pad.1@-2116.19,3150.78 -2107.48,3122.28 pad.1@-2098.77,3150.78 ; U13.1@-2115.9,3090.47 ccw(c-2136.23,3110.79) -2107.48,3110.79 ; U13.1@-2114.35,3076.46 -2144.3,3087.09 ; U13.1@-2114.35,3097.71 -2144.3,3087.09 ; U12.1@-2114.35,3411.46 pad.11@-2144.3,3422.09 ; U12.1@-2114.35,3432.71 pad.11@-2144.3,3422.09 ; pad.1@-2113.71,3145.86 cw(c-2128.75,3130.82) -2107.48,3130.82 cw(c-2086.21,3130.82) pad.1@-2101.25,3145.86 ; U13.1@-2112.88,3082.32 -2144.3,3087.09 ; U13.1@-2112.88,3091.85 -2144.3,3087.09 ; U12.1@-2112.88,3417.32 pad.11@-2144.3,3422.09 ; U12.1@-2112.88,3426.85 pad.11@-2144.3,3422.09 ; U13.1@-2112.52,3087.09 -2144.3,3087.09 ; U12.1@-2112.52,3422.09 pad.11@-2144.3,3422.09 ; -2107.48,3100.94 ccw(c-2098.66,3100.94) U13.1@-2104.9,3094.71 ; pad.1@-2107.48,3152.09 -2107.48,3097.09 -2097.48,3087.09 -2152.48,3087.09 pad.11@-2157.48,3092.09 ; U13.1@-2093.03,3083.15 -2107.48,3134.75 ; U13.1@-2087.34,3085.09 -2107.48,3134.75 ; U13.1@-2082.99,3087.09 -2107.48,3134.75 ; U13.1@-2078.84,3089.46 -2107.48,3134.75 ; U13.1@-2073.95,3092.95 -2107.48,3134.75 ; U12.1@-2053.46,3422.09 -2021.69,3422.09 ; U12.1@-2053.11,3417.32 -2021.69,3422.09 ; U12.1@-2053.11,3426.85 -2021.69,3422.09 ; U12.1@-2051.64,3411.46 -2021.69,3422.09 ; U12.1@-2051.64,3432.71 -2021.69,3422.09 ; U12.1@-2045.84,3414.46 cw(c-2027.44,3396.06) -2027.44,3422.09 cw(c-2027.44,3448.11) U12.1@-2045.84,3429.71 ; -1987.48,2322.09 pad.1@-1977.48,2332.09 -1677.48,2332.09 pad.1@-1552.48,2457.09 ; pad.1@-1978.71,3415.86 ccw(c-1993.75,3400.82) -1993.75,3422.09 ccw(c-1993.75,3443.36) pad.1@-1978.71,3428.32 ; pad.1@-1976.18,2323.37 -1947.67,2332.09 pad.1@-1976.18,2340.8 ; pad.1@-1973.78,3413.37 -2002.29,3422.09 pad.1@-1973.78,3430.8 ; pad.1@-1972.48,3422.09 pad.11@-2157.48,3422.09 ; pad.1@-1971.25,2325.86 cw(c-1956.21,2310.82) -1956.21,2332.09 cw(c-1956.21,2353.36) pad.1@-1971.25,2338.32 ; -1866.73,2332.09 ccw(c-1866.73,2385.04) C47.2@-1829.29,2347.6 ; -1852.24,2332.09 ccw(c-1852.24,2370.55) C47.2@-1825.05,2343.35 ; -1844.11,2332.09 cw(c-1844.11,2311.13) C47.2@-1829.29,2325.95 ; -1837.76,2332.09 ccw(c-1837.76,2356.07) C47.2@-1820.8,2339.11 ; C47.2@-1823.5,2351.23 -1855.21,2332.09 ; C47.2@-1820.79,2345.78 -1855.21,2332.09 ; C47.2@-1819.71,2321.52 -1855.21,2332.09 ; C47.2@-1819.03,2340.03 -1855.21,2332.09 ; C47.2@-1818.46,2327.46 -1855.21,2332.09 ; C47.2@-1818.46,2336.77 -1855.21,2332.09 ; C47.2@-1818.19,2333.48 -1855.21,2332.09 ; C47.2@-1816.77,2333.48 -1779.77,2332.09 ; C47.2@-1816.5,2327.46 -1779.77,2332.09 ; C47.2@-1816.5,2336.77 -1779.77,2332.09 ; C47.2@-1815.93,2340.03 -1779.77,2332.09 ; C47.2@-1815.25,2321.52 -1779.77,2332.09 ; C47.2@-1814.16,2339.11 ccw(c-1797.2,2356.07) -1797.2,2332.09 ; C47.2@-1814.17,2345.78 -1779.77,2332.09 ; C47.2@-1811.46,2351.23 -1779.77,2332.09 ; C47.2@-1809.91,2343.35 ccw(c-1782.72,2370.55) -1782.72,2332.09 ; C47.2@-1805.67,2325.95 cw(c-1790.85,2311.13) -1790.85,2332.09 ; C47.2@-1805.67,2347.6 ccw(c-1768.23,2385.04) -1768.23,2332.09 ; -1583.13,2426.44 ccw(c-1623.78,2467.09) pad.1@-1566.29,2467.09 ; -1572.89,2436.68 ccw(c-1603.29,2467.09) pad.1@-1560.29,2467.09 ; pad.1@-1565.62,2470.46 -1576.24,2433.32 ; -1562.64,2446.92 ccw(c-1582.81,2467.09) pad.1@-1554.29,2467.09 ; pad.1@-1557.48,2467.09 -1576.24,2433.32 ; pad.1@-1550.32,2461.96 -1576.24,2433.32 ; C11.2@-1382.76,3416.3 -1367.8,3449.38 ; R6.2@-1382.76,3487.88 -1367.8,3454.8 ; C11.2@-1378.62,3423.89 ccw(c-1404.75,3450.03) -1367.8,3450.03 ccw(c-1330.84,3450.03) C11.2@-1356.97,3423.89 ; R6.2@-1378.62,3480.28 cw(c-1404.75,3454.15) -1367.8,3454.15 cw(c-1330.84,3454.15) R6.2@-1356.97,3480.28 ; C11.2@-1377.03,3414.26 -1367.8,3449.38 ; R6.2@-1377.03,3489.91 -1367.8,3454.8 ; C11.2@-1374.38,3419.65 ccw(c-1390.26,3435.54) -1367.8,3435.54 ccw(c-1345.33,3435.54) C11.2@-1361.21,3419.65 ; R6.2@-1374.38,3484.52 cw(c-1390.27,3468.63) -1367.8,3468.63 cw(c-1345.33,3468.63) R6.2@-1361.21,3484.52 ; C11.2@-1371.1,3413.22 -1367.8,3449.38 ; R6.2@-1371.1,3490.95 -1367.8,3454.8 ; C11.2@-1367.8,3412.09 R6.2@-1367.8,3492.09 ; C11.2@-1367.8,3413.07 -1367.8,3449.38 ; R6.2@-1367.8,3491.1 -1367.8,3454.8 ; C11.2@-1364.49,3413.22 -1367.8,3449.38 ; R6.2@-1364.49,3490.95 -1367.8,3454.8 ; C11.2@-1358.57,3414.26 -1367.8,3449.38 ; R6.2@-1358.57,3489.91 -1367.8,3454.8 ; C11.2@-1352.83,3416.3 -1367.8,3449.38 ; R6.2@-1352.83,3487.88 -1367.8,3454.8 ; P8.1@-1042.03,3637.14 -1017.48,3662.09 ; P8.1@-1037.11,3633.11 -1017.48,3662.09 ; P8.1@-1031.69,3630.1 -1017.48,3662.09 ; P8.1@-1025.94,3628.13 -1017.48,3662.09 ; P8.1@-1024.65,3652.63 ccw(c-1027.3,3662.09) -1017.48,3662.09 ; P8.1@-1017.48,3627.09 -1017.48,3662.09 ; P8.1@-1010.31,3652.63 cw(c-1007.66,3662.09) -1017.48,3662.09 ; P8.1@-1009.02,3628.13 -1017.48,3662.09 ; P8.1@-1003.27,3630.1 -1017.48,3662.09 ; P8.1@-997.86,3633.11 -1017.48,3662.09 ; P8.1@-992.93,3637.14 -1017.48,3662.09 ; -969.59,3404.97 cw(c-937.48,3372.86) pad.1@-937.48,3418.28 ; U3.23@-961.53,3335.67 -981.06,3335.67 ; -959.35,3415.22 cw(c-937.48,3393.35) pad.1@-937.48,3424.28 ; pad.1@-952.48,2567.09 pad.1@-607.48,2567.09 ; pad.1@-951.18,2558.37 -922.67,2567.09 pad.1@-951.18,2575.8 ; pad.1@-946.25,2560.86 cw(c-931.21,2545.82) -931.21,2567.09 cw(c-931.21,2588.36) pad.1@-946.25,2573.32 ; pad.1@-943.2,3433.79 -966.3,3408.27 ; pad.1@-937.48,3427.09 -966.3,3408.27 ; pad.1@-937.48,3437.09 -987.48,3387.09 -987.48,3342.09 -981.06,3335.67 ; pad.1@-933.65,3419.15 -966.3,3408.27 ; U3.23@-910.35,3335.67 -887.43,3335.67 ; pad.1@-810.18,3277.8 ccw(c-817.48,3273.73) -817.48,3282.09 ; pad.1@-810.18,3286.38 cw(c-817.48,3290.45) -817.48,3282.09 ; pad.1@-808.71,3230.86 cw(c-823.75,3215.82) -802.48,3215.82 cw(c-781.21,3215.82) pad.1@-796.25,3230.86 ; U3.8@-807.01,3088.62 -807.01,3162.56 -802.48,3167.09 pad.1@-802.48,3237.09 ; U3.8@-807.01,3114.21 -807.01,3137.13 ; pad.1@-802.48,3282.09 -817.48,3282.09 ; pad.1@-767.13,3304.57 -735.6,3318.97 ; pad.1@-762.48,3299.9 ccw(c-762.48,3318.76) -749.15,3305.42 ; pad.1@-762.48,3305.9 ccw(c-762.48,3339.24) -738.9,3315.66 ; pad.1@-756.09,3291.02 -735.6,3318.97 ; pad.1@-754.16,3231.34 -727.35,3206.96 ; pad.1@-753.67,3297.09 cw(c-744.47,3297.09) -750.97,3303.59 ; pad.1@-744.67,3237.09 ccw(c-713.74,3237.09) -735.61,3215.22 ; pad.1@-739.61,3241.05 -727.35,3206.96 ; pad.1@-738.67,3237.09 ccw(c-693.26,3237.09) -725.37,3204.97 ; U3.35@-688.9,3379.96 -688.9,3365.67 ; U3.35@-688.9,3405.55 -688.9,3365.67 ; -667.53,3158.5 U3.47@-644.61,3158.5 ; pad.1@-616.19,2565.78 -607.48,2537.28 ; pad.1@-613.71,2573.32 cw(c-628.75,2588.36) -628.75,2567.09 cw(c-628.75,2545.82) -613.71,2560.86 cw(c-628.75,2545.82) -607.48,2545.82 cw(c-586.21,2545.82) pad.1@-601.25,2560.86 ; pad.1@-608.78,2558.37 -637.29,2567.09 ; pad.1@-608.78,2575.8 -637.29,2567.09 ; pad.1@-598.77,2565.78 -607.48,2537.28 ; U3.47@-593.43,3158.5 -570.5,3158.5 ; pad.1@-567.17,2987.09 -407.48,2987.09 -327.48,2907.09 -327.48,2702.09 -202.17,2576.77 pad.1@-117.48,2576.77 ; pad.1@-565.86,2978.37 -537.35,2987.09 pad.1@-565.86,2995.8 ; pad.1@-560.94,2980.86 cw(c-545.89,2965.82) -545.89,2987.09 cw(c-545.89,3008.36) pad.1@-560.94,2993.32 ; -556.09,3680.7 cw(c-600.87,3635.91) P4.2@-537.89,3629.25 ; -547.21,3671.81 cw(c-584.8,3634.21) P4.2@-531.93,3628.62 ; P4.2@-542.39,3617.95 -548.47,3673.08 ; -538.32,3662.93 cw(c-568.73,3632.51) P4.2@-525.96,3627.98 ; -537.16,3661.77 ccw(c-517.48,3681.44) P4.2@-517.48,3653.61 ; P4.2@-536.33,3618.96 -548.47,3673.08 ; P4.2@-530.49,3620.62 -548.47,3673.08 ; P4.2@-524.9,3622.88 -548.47,3673.08 ; P4.2@-517.48,3627.09 -548.47,3673.08 ; -516.32,3158.5 cw(c-516.32,3098.25) pad.1@-473.71,3140.86 ; P4.2@-512.48,3637.09 -557.48,3682.09 -637.48,3682.09 -657.48,3702.09 -657.48,3742.09 -692.48,3777.09 -947.48,3777.09 -967.48,3757.09 -967.48,3712.09 -1017.48,3662.09 ; P4.2@-510.8,3632.38 -548.47,3673.08 ; P4.2@-506.6,3636.71 -548.47,3673.08 ; P4.2@-502.87,3641.51 -548.47,3673.08 ; -501.83,3158.5 cw(c-501.83,3112.73) pad.1@-469.47,3145.1 ; P4.2@-499.67,3646.74 -548.47,3673.08 ; -487.35,3158.5 cw(c-487.35,3127.22) pad.1@-465.23,3149.34 ; -472.86,3158.5 cw(c-472.86,3141.71) pad.1@-460.98,3153.58 ; pad.1@-471.37,3139.18 -500.69,3158.5 ; pad.1@-467.48,3147.09 -500.69,3158.5 ; pad.1@-465.68,3155.71 -500.69,3158.5 ; -463.9,3158.5 -678.9,3158.5 -747.48,3227.09 pad.1@-747.48,3237.09 -727.35,3206.96 ; pad.1@-403.71,2390.86 ccw(c-418.75,2375.82) -418.75,2397.09 ccw(c-418.75,2418.36) pad.1@-403.71,2403.32 ; pad.1@-398.78,2388.37 -427.29,2397.09 pad.1@-398.78,2405.8 ; pad.1@-397.48,2397.09 -557.09,2397.09 -607.48,2447.48 pad.1@-607.48,2567.09 ; pad.1@-336.19,2835.78 -327.48,2807.28 ; pad.1@-336.19,2838.39 -327.48,2866.9 pad.1@-318.77,2838.39 ; pad.1@-333.71,2830.86 cw(c-348.75,2815.82) -327.48,2815.82 cw(c-306.21,2815.82) pad.1@-321.25,2830.86 ; pad.1@-333.71,2843.32 ccw(c-348.75,2858.36) -327.48,2858.36 ccw(c-306.21,2858.36) pad.1@-321.25,2843.32 ; pad.1@-327.48,2837.09 -327.48,2807.28 ; pad.1@-318.77,2835.78 -327.48,2807.28 ; pad.1@-237.48,2497.09 pad.1@-232.48,2502.09 107.52,2502.09 162.52,2447.09 ; pad.1@-231.18,2493.37 -202.67,2502.09 pad.1@-231.18,2510.8 ; pad.1@-226.25,2495.86 cw(c-211.21,2480.82) -211.21,2502.09 cw(c-211.21,2523.36) pad.1@-226.25,2508.32 ; pad.1@-123.71,2570.54 ccw(c-138.75,2555.5) -138.75,2576.77 ccw(c-138.75,2598.04) pad.1@-123.71,2583 ; pad.1@-118.78,2568.06 -147.29,2576.77 pad.1@-118.78,2585.49 ; pad.1@-92.48,3247.09 U7.1@2.52,3247.09 -20.4,3247.09 ; pad.1@-86.25,3240.86 cw(c-71.21,3225.82) -71.21,3247.09 cw(c-71.21,3268.36) pad.1@-86.25,3253.32 ; pad.1@-50.08,2964.69 pad.1@50.12,2964.69 20.31,2964.69 ; pad.1@-48.78,2955.97 -20.27,2964.69 pad.1@-48.78,2973.4 ; pad.1@-43.85,2958.46 cw(c-28.81,2943.42) -28.81,2964.69 cw(c-28.81,2985.96) pad.1@-43.85,2970.92 ; U7.18@2.52,3094.53 2.52,3117.45 ; U7.1@2.52,3222.48 2.52,3207.09 ; U7.1@2.52,3242.09 2.52,3207.09 ; 8.94,3200.66 ccw(c32.52,3224.24) pad.1@32.52,3190.9 ; 9.28,3069.92 U7.18@2.52,3069.92 2.52,3127.42 42.35,3167.25 ; 19.19,3190.42 ccw(c32.52,3203.76) pad.1@32.52,3184.9 ; 21.01,3188.59 cw(c14.51,3182.09) pad.1@23.71,3182.09 ; pad.1@26.13,3176.02 6.38,3203.23 ; pad.1@26.45,3175.7 54.22,3155.39 ; pad.1@32.52,3173.28 cw(c32.52,3164.08) 39.03,3170.58 ; pad.1@35.33,3182.09 ccw(c54.19,3182.09) 40.85,3168.75 ; pad.1@37.11,3189.6 6.38,3203.23 ; pad.1@40.01,3186.72 54.22,3155.39 ; pad.1@41.33,3182.09 ccw(c74.67,3182.09) 51.1,3158.51 ; pad.1@43.89,2958.46 ccw(c28.85,2943.42) 28.85,2964.69 ccw(c28.85,2985.96) pad.1@43.89,2970.92 ; pad.1@48.82,2955.97 20.31,2964.69 ; pad.1@48.82,2973.4 20.31,2964.69 ; P3.1@62.52,2407.09 P7.4@162.52,2407.09 ; P3.1@63.28,2398.59 110.05,2407.09 ; P3.1@63.28,2415.58 110.05,2407.09 ; P3.1@64.74,2392.73 110.05,2407.09 ; P3.1@64.74,2421.44 110.05,2407.09 ; P3.1@66.95,2387.04 110.05,2407.09 ; P3.1@66.95,2427.13 110.05,2407.09 ; P3.1@69.92,2381.61 110.05,2407.09 ; P3.1@69.92,2432.56 110.05,2407.09 ; P3.1@72.79,2396.81 cw(c97.59,2372.01) 97.59,2407.09 cw(c97.59,2442.16) P3.1@72.79,2417.36 ; P3.1@77.03,2392.57 cw(c112.08,2357.53) 112.08,2407.09 cw(c112.08,2456.64) P3.1@77.03,2421.6 ; P3.1@81.28,2388.33 cw(c126.56,2343.04) 126.56,2407.09 cw(c126.56,2471.13) P3.1@81.28,2425.84 ; 92.79,3128.98 U7.11@115.71,3128.98 ; 132.52,2347.09 ccw(c104.41,2375.2) P7.4@139.26,2394.33 ; P7.4@136.57,2412.58 137.26,2351.83 ; P7.4@137.49,2415.88 162.52,2447.09 ; 138.18,2352.74 ccw(c111.71,2379.21) P7.4@144.52,2397.21 ; U7.11@140.31,3128.98 80.63,3128.98 2.52,3207.09 ; P7.4@142.68,2412.34 137.26,2351.83 ; P7.4@142.68,2412.35 162.52,2447.09 ; P7.4@143.76,2388.33 ccw(c98.48,2343.04) 98.48,2407.09 ccw(c98.48,2471.13) P7.4@143.76,2425.84 ; 143.83,2358.4 ccw(c119.01,2383.22) P7.4@149.78,2400.1 ; P7.4@148,2392.57 ccw(c112.96,2357.53) 112.96,2407.09 ccw(c112.96,2456.64) P7.4@148,2421.6 ; P7.4@148.23,2409.72 162.52,2447.09 ; P7.4@148.68,2411.5 137.26,2351.83 ; 149.49,2364.05 ccw(c126.32,2387.22) P7.4@155.04,2402.98 ; P7.4@152.2,2431.52 ccw(c145.63,2447.09) 162.52,2447.09 ; P7.4@152.25,2396.81 ccw(c127.45,2372.01) 127.45,2407.09 ccw(c127.45,2442.16) P7.4@152.25,2417.36 ; P7.4@152.52,2407.09 P7.4@162.52,2397.09 ; P7.4@154.04,2408 162.52,2447.09 ; P7.4@154.53,2410.08 137.26,2351.83 ; P7.4@154.53,2426 ccw(c149.45,2438.04) 162.52,2438.04 ccw(c175.59,2438.04) P7.4@170.51,2426 ; 155.14,2369.71 ccw(c133.62,2391.23) P7.4@160.3,2405.87 ; P7.4@155.12,2381.61 114.99,2407.09 ; P7.4@155.12,2432.56 114.99,2407.09 ; P7.4@158.09,2387.04 114.99,2407.09 ; P7.4@158.09,2427.13 114.99,2407.09 ; P7.4@160.3,2392.73 114.99,2407.09 ; P7.4@160.3,2421.44 114.99,2407.09 ; 160.8,2375.36 ccw(c140.93,2395.24) P7.4@165.56,2408.76 ; P7.4@161.75,2398.59 114.99,2407.09 ; P7.4@161.75,2415.58 114.99,2407.09 ; P7.4@170.01,2403.01 137.26,2351.83 ; P7.4@171,2408 162.52,2447.09 ; P7.4@172.84,2431.52 cw(c179.41,2447.09) 162.52,2447.09 ; P7.4@174.92,2399.51 137.26,2351.83 ; P7.4@176.81,2409.72 162.52,2447.09 ; P7.4@179.48,2395.52 137.26,2351.83 ; P7.4@182.36,2412.35 162.52,2447.09 ; P7.4@183.66,2391.06 137.26,2351.83 ; P7.4@187.55,2415.88 162.52,2447.09 ; pad.1@271.49,2943.2 351.4,2943.2 352.52,2942.09 pad.1@352.52,2827.09 402.52,2877.09 762.52,2877.09 772.52,2887.09 pad.1@772.52,3117.09 822.52,3117.09 pad.1@832.52,3127.09 796.29,3117.09 ; pad.1@272.79,2934.49 301.3,2943.2 pad.1@272.79,2951.92 ; pad.1@277.72,2936.97 cw(c292.76,2921.93) 292.76,2943.2 cw(c292.76,2964.48) pad.1@277.72,2949.43 ; P5.2@336.1,2304.66 cw(c289.26,2300.35) 322.52,2267.09 ; P5.2@339.89,2320.92 322.52,2267.09 ; P5.2@342.08,2305.21 cw(c305.83,2301.88) 331.57,2276.14 cw(c357.31,2250.39) P5.2@360.64,2286.65 ; pad.1@343.81,2828.39 352.52,2856.9 pad.1@361.23,2828.39 ; P5.2@345.61,2318.73 322.52,2267.09 ; pad.1@346.29,2833.32 ccw(c331.25,2848.36) 352.52,2848.36 ccw(c373.79,2848.36) pad.1@358.75,2833.32 ; pad.1@347.13,2834.06 377.06,2851.63 pad.1@359.49,2821.7 ; P5.2@348.05,2305.76 cw(c322.4,2303.4) 340.62,2285.18 cw(c358.83,2266.96) P5.2@361.19,2292.62 ; P5.2@351.01,2315.95 322.52,2267.09 ; pad.1@352.52,2835.9 ccw(c352.52,2857.17) 367.56,2842.13 ccw(c382.6,2827.09) pad.1@361.33,2827.09 ; P5.2@356.05,2312.64 322.52,2267.09 ; P5.2@360.09,2280.67 ccw(c355.79,2233.82) 322.52,2267.09 ; P5.2@362.52,2307.09 322.52,2267.09 ; P5.2@368.08,2300.62 322.52,2267.09 ; P5.2@371.39,2295.58 322.52,2267.09 ; P5.2@374.16,2290.18 322.52,2267.09 ; P5.2@376.36,2284.45 322.52,2267.09 ; pad.1@617.72,3509.7 637.52,3502.09 ; pad.1@622.54,3508.28 cw(c622.58,3487.15) 637.52,3502.09 ; pad.1@622.52,3517.09 637.52,3502.09 ; pad.1@629.91,3521.89 637.52,3502.09 ; pad.1@631.33,3517.07 ccw(c652.46,3517.03) 637.52,3502.09 ; pad.1@752.52,2772.09 782.36,2772.87 ; pad.1@753.31,2772.87 pad.1@936.73,2772.87 ; pad.1@753.59,2780.83 782.36,2772.87 ; pad.1@754.05,2763.41 782.36,2772.87 ; pad.1@758.75,2765.86 cw(c775.69,2748.91) 775.69,2772.87 ; pad.1@758.75,2778.32 ccw(c771.89,2791.46) 771.89,2772.87 ; pad.1@763.81,3115.78 772.52,3087.28 pad.1@781.23,3115.78 ; pad.1@766.29,3110.86 cw(c751.25,3095.82) 772.52,3095.82 cw(c793.79,3095.82) 778.75,3110.86 cw(c793.79,3095.82) 793.79,3117.09 cw(c793.79,3138.36) pad.1@778.75,3123.32 ; pad.1@773.82,3108.37 802.33,3117.09 pad.1@773.82,3125.8 ; 787.11,3117.09 ccw(c787.11,3172.5) pad.1@826.29,3133.32 ; 801.59,3117.09 ccw(c801.59,3158.02) pad.1@830.53,3129.07 ; 816.08,3117.09 ccw(c816.08,3143.53) pad.1@834.77,3124.83 ; pad.1@829.2,3135.25 796.29,3117.09 ; pad.1@833.85,3118.38 796.29,3117.09 ; U8.1@897.74,3367.24 932.52,3407.94 ; U8.1@912.78,3358.17 932.52,3407.94 ; 924.35,2772.87 cw(c924.35,2748.91) pad.1@941.29,2765.86 ; 928.15,2772.87 ccw(c928.15,2791.46) pad.1@941.29,2778.32 ; U8.1@930.15,3368.32 ccw(c924.42,3374.04) 932.52,3374.04 ; U8.1@932.52,3362.09 932.52,3497.09 852.52,3577.09 757.52,3577.09 717.52,3537.09 717.52,3527.09 692.52,3502.09 637.52,3502.09 ; 932.52,3378.19 ccw(c952.48,3378.19) U8.1@938.37,3364.07 ; 932.52,3392.67 ccw(c966.96,3392.67) 942.61,3368.32 ccw(c957.65,3383.36) 957.65,3362.09 ccw(c957.65,3340.82) U8.1@942.61,3355.86 ; U8.1@936.38,3362.09 966.19,3362.09 ; U8.1@937.68,3353.37 966.19,3362.09 ; U8.1@937.68,3370.8 966.19,3362.09 ; pad.1@946,2763.41 917.47,2772.87 ; pad.1@946.46,2780.83 917.47,2772.87 ; pad.1@947.52,2772.09 917.47,2772.87 ; pad.1@1033.71,3307.09 ccw(c1012.44,3307.09) 1027.48,3322.13 ccw(c1042.52,3337.17) pad.1@1042.52,3315.9 ; pad.1@1035.55,3301.7 1017.98,3331.63 ; pad.1@1042.52,3307.09 1017.98,3331.63 ; pad.1@1047.52,3302.09 987.52,3362.09 U8.1@904.88,3362.09 932.52,3407.94 ; pad.1@1047.91,3314.06 1017.98,3331.63 ; C22.2@1147.56,2900.63 pad.1@1162.52,2933.71 ; C22.2@1151.7,2908.23 ccw(c1125.57,2934.36) 1162.52,2934.36 ccw(c1199.47,2934.36) C22.2@1173.34,2908.23 ; C22.2@1153.29,2898.59 pad.1@1162.52,2933.71 ; pad.1@1153.74,2941.36 C22.2@1160.56,2912.25 ; pad.1@1153.72,2942.45 C22.2@1156.86,2912.19 ; pad.1@1153.84,2943.6 C22.2@1152.85,2912.32 ; pad.1@1153.91,2940.22 C22.2@1164.48,2912.25 ; pad.1@1154.19,2939.21 C22.2@1168.18,2912.19 ; pad.1@1154.61,2938.21 C22.2@1172.19,2912.32 ; C22.2@1155.94,2903.98 ccw(c1140.05,2919.87) 1162.52,2919.87 ccw(c1184.99,2919.87) C22.2@1169.1,2903.98 ; pad.1@1156.29,2935.86 cw(c1141.25,2920.82) 1162.52,2920.82 cw(c1183.79,2920.82) pad.1@1168.75,2935.86 ; C22.2@1159.22,2897.55 pad.1@1162.52,2933.71 ; C22.2@1162.52,2892.09 pad.1@1162.52,2942.09 ; C22.2@1162.52,2897.4 pad.1@1162.52,2933.71 ; C22.2@1165.82,2897.55 pad.1@1162.52,2933.71 ; pad.1@1170.43,2938.21 C22.2@1152.85,2912.32 ; pad.1@1170.85,2939.21 C22.2@1156.86,2912.19 ; pad.1@1171.13,2940.22 C22.2@1160.56,2912.25 ; pad.1@1171.2,2943.6 C22.2@1172.19,2912.32 ; pad.1@1171.3,2941.36 C22.2@1164.48,2912.25 ; pad.1@1171.32,2942.45 C22.2@1168.18,2912.19 ; C22.2@1171.75,2898.59 pad.1@1162.52,2933.71 ; C22.2@1177.48,2900.63 pad.1@1162.52,2933.71 ; -2619.42,2664.42 P2.7@-2577.48,2622.09 -2533.68,2583.68 ; pad.11@-2157.48,3092.09 U13.1@-2121.6,3090.53 ; pad.11@-2157.48,3092.09 U13.1@-2120.9,3095.38 ; pad.11@-2157.48,3092.09 U13.1@-2124.46,3084.08 ; pad.11@-2157.48,3092.09 U13.1@-2122.78,3087.09 ; pad.11@-2157.48,3092.09 -2126.77,3080.87 ; pad.11@-2157.48,3092.09 U13.1@-2124.89,3087.09 ; pad.11@-2157.48,3422.09 U12.1@-2124.93,3425.02 ; pad.11@-2157.48,3422.09 U12.1@-2125.7,3422.09 ; pad.11@-2157.48,3422.09 U12.1@-2124.93,3419.15 ; pad.11@-2157.48,3422.09 U12.1@-2124.09,3414.92 ; pad.11@-2157.48,3422.09 U12.1@-2124.09,3429.26 ; pad.11@-2157.48,3422.09 U12.1@-2125.7,3422.09 ; U12.1@-2125.7,3422.09 -2157.12,3417.32 U12.1@-2125.7,3422.09 ; U12.1@-2125.7,3422.09 -2157.12,3426.85 U12.1@-2125.7,3422.09 ; U12.1@-2125.7,3422.09 -2155.65,3411.46 U12.1@-2125.7,3422.09 ; U12.1@-2125.7,3422.09 -2155.65,3432.71 U12.1@-2125.7,3422.09 ; -981.06,3335.67 -871.06,3335.67 -817.48,3282.09 ; -735.6,3318.97 pad.1@-762.48,3297.09 -757.48,3297.09 -688.9,3365.67 ; -637.29,2567.09 pad.1@-607.48,2567.09 ; -607.48,2537.28 pad.1@-607.48,2567.09 ; 6.38,3203.23 pad.1@32.52,3182.09 54.22,3155.39 ; 137.26,2351.83 P7.4@162.52,2407.09 ; P7.4@162.52,2407.09 162.52,2447.09 ; 162.52,2447.09 162.52,2377.09 117.52,2332.09 117.52,2287.09 137.52,2267.09 322.52,2267.09 ; C22.2@1152.85,2912.32 pad.1@1162.52,2942.09 ; C22.2@1156.86,2912.19 pad.1@1162.52,2942.09 ; C22.2@1160.56,2912.25 pad.1@1162.52,2942.09 ; C22.2@1162.52,2912.28 1153.81,2940.78 C22.2@1162.52,2912.28 ; C22.2@1162.52,2912.28 1171.23,2940.78 C22.2@1162.52,2912.28 ; C22.2@1162.52,2912.28 pad.1@1162.52,2942.09 ; pad.1@1162.52,2942.09 C22.2@1172.19,2912.32 ; pad.1@1162.52,2942.09 C22.2@1168.18,2912.19 ; pad.1@1162.52,2942.09 C22.2@1164.48,2912.25
  Bottom Layer w7: R14.1@-1314.72,3580.81 -1272.1,3597.47 ; R14.1@-1311.65,3574.46 -1272.1,3597.47 ; R14.1@-1307.17,3567.09 -1302.48,3567.09 -1227.48,3642.09 -1227.48,3702.09 -1202.48,3727.09 -1117.48,3727.09 P8.1@-1032.48,3642.09 ; R14.1@-1307.17,3568.07 -1272.1,3597.47 ; R14.1@-1307.17,3575.88 ccw(c-1307.17,3608.41) -1284.16,3585.41 ; R14.1@-1307.17,3582.88 ccw(c-1307.17,3632.31) -1272.21,3597.36 ; R14.1@-1301.66,3562.54 -1272.1,3597.47 ; R14.1@-1295.94,3558.41 -1272.1,3597.47 ; R14.1@-1292.36,3568.07 cw(c-1270.3,3568.07) -1285.9,3583.67 ; P8.1@-1043.51,3627.09 ccw(c-1106.34,3627.09) -1061.91,3671.52 ccw(c-1017.48,3715.95) P8.1@-1017.48,3653.11 ; P8.1@-1039.3,3612.9 -1061.86,3671.46 ; P8.1@-1036.51,3627.09 ccw(c-1082.44,3627.09) -1049.96,3659.57 ccw(c-1017.48,3692.05) P8.1@-1017.48,3646.11 ; P8.1@-1032.82,3615.83 -1061.86,3671.46 ; P8.1@-1026.76,3619.44 -1061.86,3671.46 ; P8.1@-1021.17,3623.68 -1061.86,3671.46 ; P8.1@-1017.48,3627.09 -1061.86,3671.46 ; P8.1@-1014.07,3630.78 -1061.86,3671.46 ; P8.1@-1009.83,3636.37 -1061.86,3671.46 ; P8.1@-1006.22,3642.43 -1061.86,3671.46 ; P8.1@-1003.29,3648.91 -1061.86,3671.46
  Bottom Layer w10: C43.2@-1697.48,2807.09 -1392.48,2807.09 ; C43.2@-1695.99,2792.79 -1628.11,2807.09 ; C43.2@-1695.99,2821.38 -1628.11,2807.09 ; C43.2@-1693.2,2783.1 -1628.11,2807.09 ; C43.2@-1693.2,2831.08 -1628.11,2807.09 ; C43.2@-1688.97,2773.79 -1628.11,2807.09 ; C43.2@-1688.97,2840.39 -1628.11,2807.09 ; C43.2@-1680.25,2789.85 cw(c-1638.65,2748.25) -1638.65,2807.09 cw(c-1638.65,2865.92) C43.2@-1680.25,2824.32 ; C43.2@-1673.18,2782.78 cw(c-1614.5,2724.11) -1614.5,2807.09 cw(c-1614.5,2890.06) C43.2@-1673.18,2831.39 ; R6.2@-1376.5,3503.14 -1330.31,3534.26 ; pad.1@-1369.29,2837.09 cw(c-1385.73,2837.09) -1374.11,2825.46 cw(c-1362.48,2813.83) pad.1@-1362.48,2830.28 ; R6.2@-1367.8,3492.09 -1367.8,3496.77 R14.1@-1312.48,3552.09 ; R6.2@-1367.8,3493.07 -1330.31,3534.26 ; R6.2@-1367.8,3506.38 ccw(c-1367.8,3529.57) -1351.4,3513.17 ; pad.1@-1367.67,2841.5 -1392.48,2807.09 ; pad.1@-1362.48,2837.09 -1392.48,2807.09 ; pad.1@-1358.07,2831.9 -1392.48,2807.09 ; R6.2@-1356.95,3485.35 -1330.31,3534.26 ; R6.2@-1354.49,3493.07 cw(c-1313.43,3493.07) -1342.46,3522.11 ; -1336.03,3528.53 ccw(c-1373.6,3566.1) R14.1@-1320.47,3566.1 ; -1318.96,3545.6 ccw(c-1339.46,3566.1) R14.1@-1310.47,3566.1 ; R14.1@-1318.46,3573.13 -1342.25,3522.31 ; R14.1@-1315.03,3549.54 cw(c-1307.17,3541.67) R14.1@-1307.17,3552.8 ; R14.1@-1307.17,3566.1 -1342.25,3522.31 ; R14.1@-1297.84,3556.61 -1342.25,3522.31
CH340_D+: P6.3 pad.1@937.52,3162.09 U8.5 | length 369.6
  Top Layer w7: pad.1@929.28,3163.14 937.52,3194.9 pad.1@945.76,3163.14 ; pad.1@931.64,3167.96 ccw(c917.46,3182.15) 937.52,3182.15 ccw(c957.58,3182.15) pad.1@943.4,3167.96 ; pad.1@937.52,3162.09 937.52,3197.09 987.52,3247.09 P6.3@1051.02,3247.09 ; P6.3@1024.31,3243.99 ccw(c1016.84,3236.53) 1016.84,3247.09 ccw(c1016.84,3257.65) P6.3@1024.31,3250.18 ; P6.3@1027.07,3242.73 998.53,3247.09 ; P6.3@1027.07,3251.45 998.53,3247.09 ; P6.3@1027.4,3247.09 998.53,3247.09
CH340_D-: P6.4 pad.1@902.52,3112.09 U8.6 | length 418.1
  Top Layer w6: pad.1@902.52,3112.09 947.52,3112.09 967.52,3132.09 967.52,3192.09 996.93,3221.5 P6.4@1051.02,3221.5 ; pad.1@903.82,3103.37 932.33,3112.09 pad.1@903.82,3120.8 ; pad.1@908.75,3105.86 cw(c923.79,3090.82) 923.79,3112.09 cw(c923.79,3133.36) pad.1@908.75,3118.32 ; P6.4@1023.96,3218.05 ccw(c1015.63,3209.73) 1015.63,3221.5 ccw(c1015.63,3233.26) P6.4@1023.96,3224.94 ; P6.4@1026.94,3216.64 1001.53,3221.5 ; P6.4@1026.94,3226.35 1001.53,3221.5 ; P6.4@1027.4,3221.5 1001.53,3221.5
CH340_ED+: P17.3 pad.1@-625,1635 U15.5 | length 538.2
  Bottom Layer w7: P17.3@-824.33,1724.24 -820,1710 ; P17.3@-823.09,1721.79 cw(c-830.56,1714.32) -820,1714.32 cw(c-809.44,1714.32) P17.3@-816.91,1721.79 ; P17.3@-820,1724.88 -820,1710 ; P17.3@-820,1748.5 -820,1710 ; P17.3@-815.67,1724.24 -820,1710 ; -669.21,1645 cw(c-669.21,1590.79) pad.1@-630.88,1629.12 ; -652.31,1645 cw(c-652.31,1607.69) pad.1@-625.93,1634.07 ; -635.41,1645 cw(c-635.41,1624.59) pad.1@-620.98,1639.02 ; pad.1@-627.8,1627.18 -665.27,1645 ; pad.1@-623.81,1643.23 -665.27,1645 ; -820,1710 -755,1645 -635,1645 pad.1@-625,1635 -665.27,1645
CH340_ED-: P17.4 pad.1@-680,1615 U15.6 | length 468.4
  Bottom Layer w7: P17.4@-849.95,1724.49 -845.59,1700.59 ; P17.4@-848.68,1721.79 cw(c-856.15,1714.32) -845.59,1714.32 cw(c-835.03,1714.32) P17.4@-842.5,1721.79 ; P17.4@-845.59,1724.88 -845.59,1700.59 ; P17.4@-845.59,1748.5 -845.59,1700.59 ; P17.4@-841.23,1724.49 -845.59,1700.59 ; pad.1@-685.88,1609.12 ccw(c-700.06,1594.94) -700.06,1615 ccw(c-700.06,1635.06) pad.1@-685.88,1620.88 ; pad.1@-681.05,1606.76 -712.81,1615 ; pad.1@-681.05,1623.24 -712.81,1615 ; -845.59,1700.59 -760,1615 pad.1@-680,1615 -712.81,1615
CHK_V: R30.2 R31.1 U9.2 U9.6 | length 1978
  Bottom Layer w7: U9.2@410.04,-14.92 479.53,-14.92 529.53,35.08 ; U9.2@431.54,-14.92 464.35,-14.92 ; U9.2@432.59,-23.17 464.35,-14.92 ; U9.2@432.59,-6.68 464.35,-14.92 ; U9.2@437.41,-20.8 cw(c451.6,-34.99) 451.6,-14.92 cw(c451.6,5.14) U9.2@437.41,-9.04 ; U9.6@551.64,29.2 ccw(c537.46,15.01) 537.46,35.08 ccw(c537.46,55.14) U9.6@551.64,40.96 ; U9.6@556.29,26.86 529.53,35.08 ; U9.6@556.29,43.3 529.53,35.08 ; U9.6@557.52,35.08 529.53,35.08 ; U9.6@620.51,35.08 653.32,35.08 ; U9.6@621.56,26.83 653.32,35.08 ; U9.6@621.56,43.32 653.32,35.08 ; U9.6@626.39,29.2 cw(c640.58,15.01) 640.58,35.08 cw(c640.58,55.14) U9.6@626.39,40.96 ; R31.1@1061.84,186.07 1084.53,221.44 ; R30.2@1061.84,274.09 1084.53,238.72 ; R31.1@1065.04,190.86 ccw(c1018,237.91) 1084.53,237.91 ; R30.2@1065.04,269.29 cw(c1018,222.25) 1084.53,222.25 ; R31.1@1068.08,182.77 1084.53,221.44 ; R30.2@1068.08,277.39 1084.53,238.72 ; R31.1@1069.99,185.91 ccw(c1034.9,221.01) 1084.53,221.01 ; R30.2@1069.99,274.24 cw(c1034.9,239.15) 1084.53,239.15 ; R31.1@1074.94,180.96 ccw(c1051.8,204.11) 1084.53,204.11 ; R30.2@1074.94,279.19 cw(c1051.8,256.05) 1084.53,256.05 ; R31.1@1075.51,180.39 1084.53,221.44 ; R30.2@1075.51,279.76 1084.53,238.72 ; R31.1@1083.26,179.43 1084.53,221.44 ; R30.2@1083.26,280.72 1084.53,238.72 ; R31.1@1084.53,180.39 R30.2@1084.53,279.76 ; 1084.53,230.08 744.53,230.08 719.53,205.08 719.53,80.08 674.53,35.08 529.53,35.08 ; R31.1@1090.31,179.81 1084.53,221.44 ; R30.2@1090.31,280.34 1084.53,238.72